# Altium PCB 模拟计量PCB.PcbDoc
Units mm, origin at the board's own origin, x right, y up, seen from the top; angles counter-clockwise.
Board outline 64.01 x 39.12 mm, 2 copper layers (Top Layer, Bottom Layer); 38 components, 29 nets, 133 pads, 115 vias.
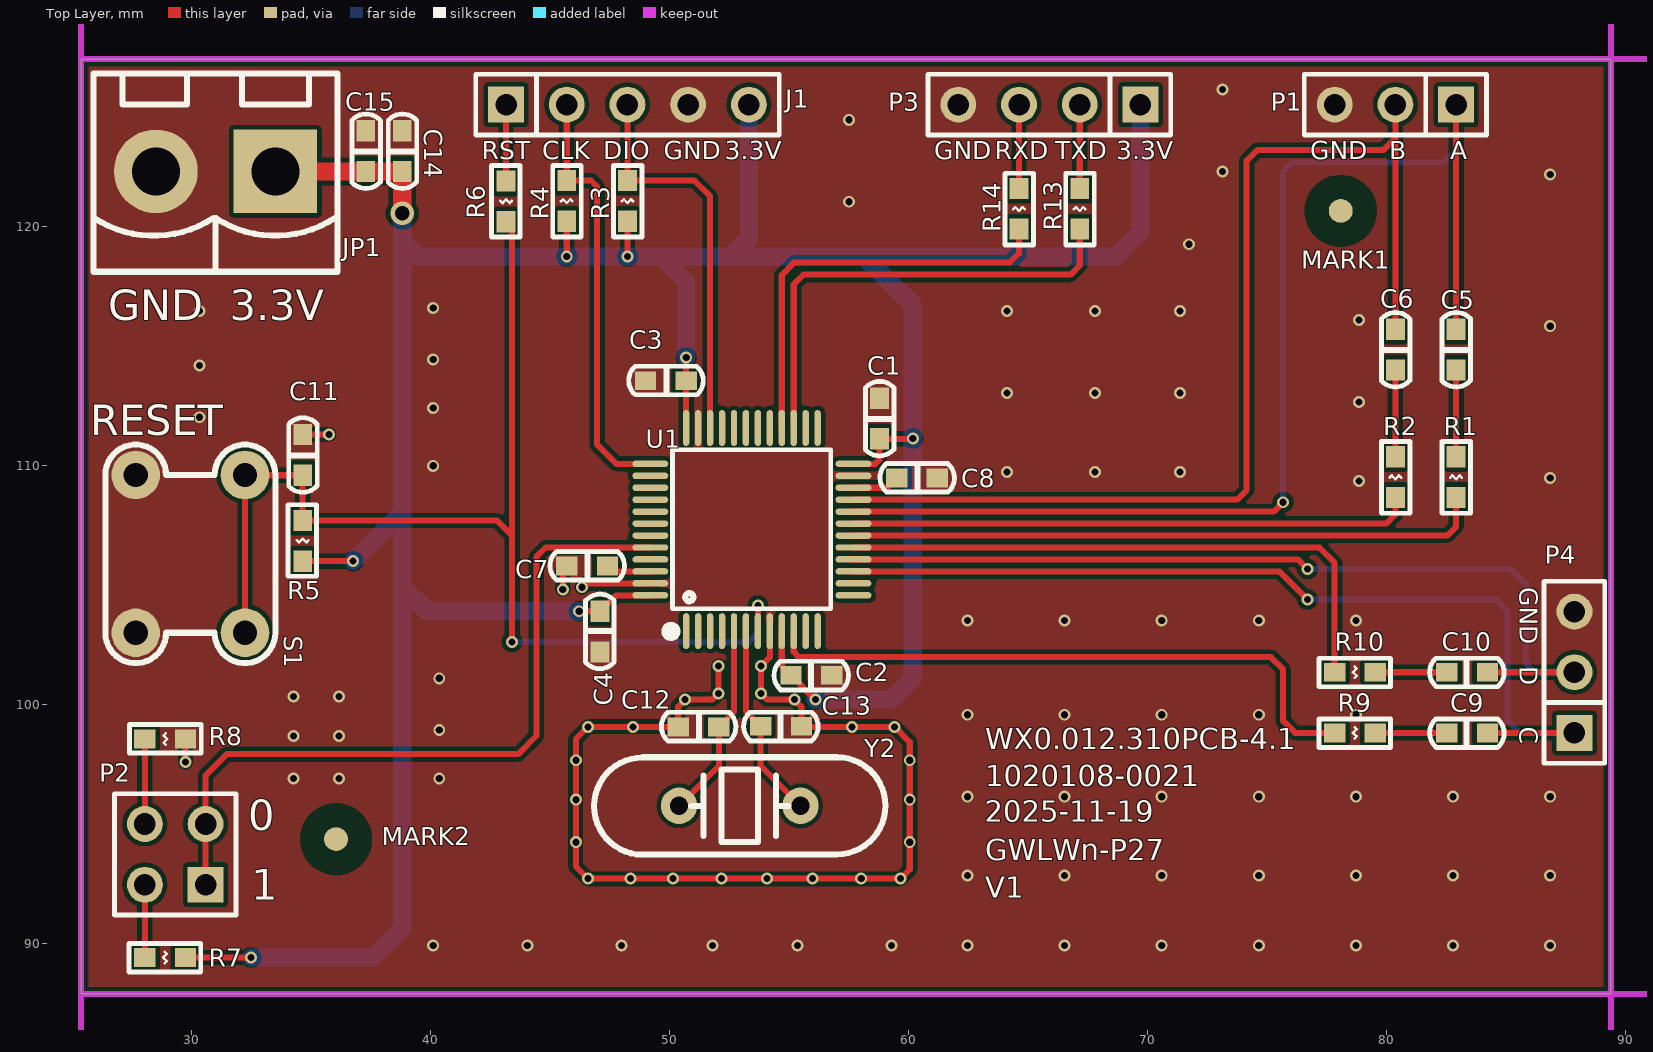
[diagram p0: Top Layer view]
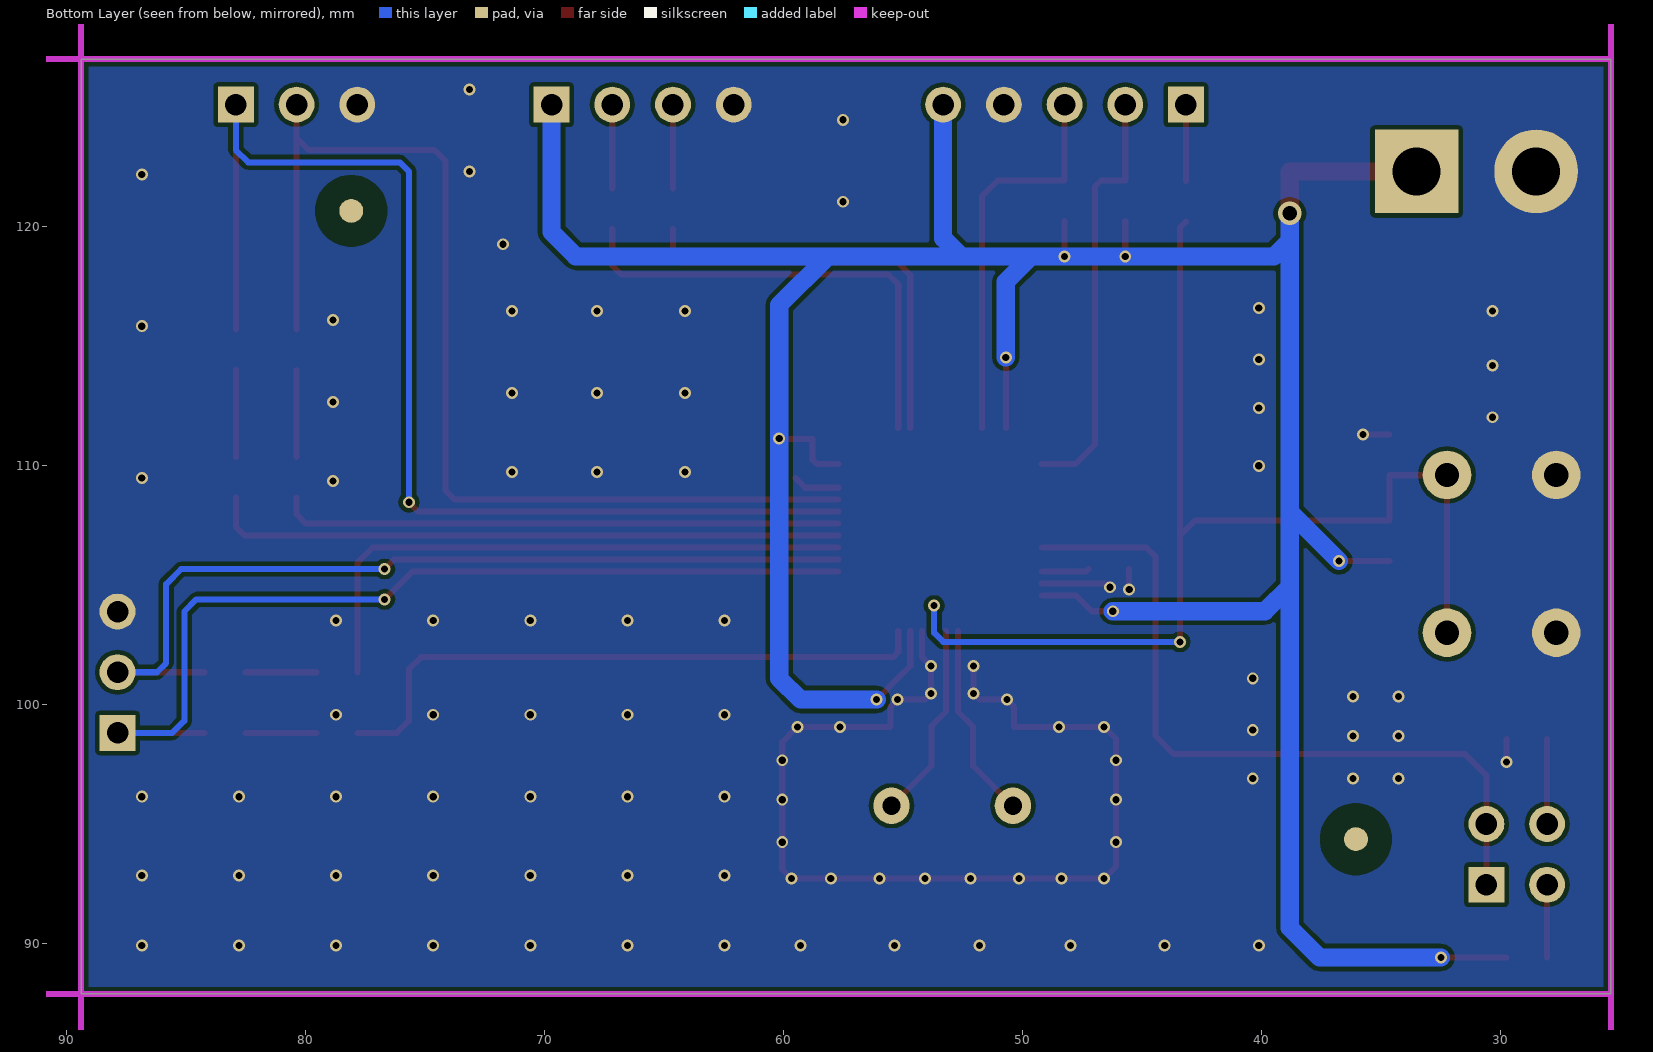
[diagram p1: Bottom Layer view, seen from below]

## Layer stack, top to bottom
Top Solder: solder mask 0.0102, Solder Resist, Dk 3.5
Top Layer: signal copper 0.0356
Dielectric 1: dielectric 0.32, FR-4, Dk 4.8
Bottom Layer: signal copper 0.0356
Bottom Solder: solder mask 0.0102, Solder Resist, Dk 3.5

## Board outline
25.4,87.884 25.4,127 89.408,127 89.408,87.884

## Design rules (kind name [scope] priority, off if disabled: settings)
Clearance [All] p1: gap=0.178 ignorepadtopadclearanceinfootprint=FALSE except(0: Arc-Hole Track-Hole SMDPad-Hole THPad-Hole Via-Hole Fill-Hole Poly-Hole Region-Hole Text-Hole; 0.127: SMDPad-SMDPad)
MinimumSolderMaskSliver [All] p1: minsoldermaskwidth=0.127
PolygonConnect [All] p1: connectstyle=Direct reliefconductorwidth=0.254 reliefentries=4 polygonreliefangle="90 Angle" airgapwidth=0.254
RoutingVias [All] p1: holewidth=0.711 width=1.27 viastyle="Through Hole" minholewidth=0.711 minwidth=1.27 maxholewidth=0.711 maxwidth=1.27
SilkToSilkClearance [All] p1: silktosilkclearance=0
SilkToSolderMaskClearance [IsPad] p1: minsilkscreentomaskgap=0 clearancetoexposedcopper=TRUE
SolderMaskExpansion [All] p1: expansion=0.102
Width [All] p1: maxlimit=0.762 minlimit=0.254 preferedwidth=0.254
27 further rules are at their usual default settings.

## Classes and differential pairs
component class STM32H503CBT61_STM32H503CBT6: C1 C2 C3 C4 C5 C6 C7 C8 C9 C10 C11 C12 C13 C14 C15 J1 JP1 P1 P2 P3 P4 R1 R2 R3 R4 R5 R6 R7 R8 R9 R10 R13 R14 S1 U1 Y2

## Components (designator, comment, footprint, x,y, rotation, side; value= is the part's Value field where it differs from the comment)
C1 "100nF/50V" CAP0603 58.801,111.125 r90 top
C2 "100nF/50V" CAP0603 55.118,101.219 r0 top
C3 "100nF/50V" CAP0603 50.704,113.538 r180 top
C4 "100nF/50V" CAP0603 47.117,103.886 r270 top
C5 "33pF/50V" CAP0603 82.931,114.008 r90 top
C6 "33pF/50V" CAP0603 80.391,114.008 r90 top
C7 "100nF/50V" CAP0603 47.409,105.791 r180 top
C8 "100nF/50V" CAP0603 61.214,109.474 r180 top
C9 "33pF/50V" CAP0603 82.55,98.806 r0 top
C10 "33pF/50V" CAP0603 82.55,101.346 r0 top
C11 "100nF/50V" CAP0603 34.671,109.601 r90 top
C12 "10pF/50V" CAP0603 52.07,99.06 r180 top
C13 "10pF/50V" CAP0603 53.848,99.085 r0 top
C14 "100nF/50V" CAP0603 38.837,122.313 r90 top
C15 "10uF/10V" CAP0603 37.313,122.313 r90 top
J1 "PIN254_1*5*WXHJ" PIN254_1*5*1100S 43.18,125.095 r0 top
JP1 "KF129_508_2" KF129_508_2 33.528,122.301 r180 top
MARK1 "Comment" MARK 78.105,120.65 r0 top
MARK2 "Comment" MARK 36.068,94.361 r0 top
P1 "PIN254_1*3*WXHJ" "PIN254_1*3*1100S - duplicate" 82.931,125.095 r180 top
P2 "Header 2X2" HDR2X2 30.607,92.456 r90 top
P3 "PIN254_1*4*WXHJ" PIN254_1*4*1100S 69.723,125.095 r180 top
P4 "PIN254_1*3*WXHJ" "PIN254_1*3*1100S - duplicate" 87.884,98.806 r90 top
R1 "3.3K 1%" RES0603 82.931,108.661 r90 top
R2 "3.3K 1%" RES0603 80.391,108.661 r90 top
R3 "10K 5%" RES0603 48.26,120.218 r90 top
R4 "10K 5%" RES0603 45.72,120.218 r90 top
R5 "10K 5%" RES0603 34.671,107.696 r270 top
R6 "100R 1%" RES0603 43.18,121.895 r270 top
R7 "1K 5%" RES0603 28.067,89.408 r0 top
R8 "1K 5%" RES0603 29.769,98.552 r180 top
R9 "3.3K 1%" RES0603 77.851,98.806 r0 top
R10 "3.3K 1%" RES0603 77.851,101.346 r0 top
R13 "1K 5%" RES0603 67.183,119.888 r90 top
R14 "1K 5%" RES0603 64.643,119.888 r90 top
S1 "SWT_4_600_600_430" SWT_4_600_600 29.972,106.299 r90 top
U1 "STM32H503CBT6" LQFP-48 53.467,107.315 r0 top
Y2 "8M" HC-49S 52.959,95.758 r0 top

## Footprints (in the part's own frame and the unit in brackets; to place one, negate y for a bottom-side part, rotate by r counter-clockwise, add the part's x,y. Pads: shape width x height; smd on the part's side, far side on the other; paste and mask are expansions set on the pad)
CAP0603 [mil]
  rect 35x31 smd: 1(-0.49,0) 2(66.51,0)
  silkscreen extent -29,-24 94,23, body extent 1,-15 72,15, height 20
HC-49S [mil]
  round 60 hole 30: 1(-100,0) 2(100,0)
  silkscreen extent -240,-80 240,80, body extent -223,-93 223,90, height 138
HDR2X2 [mm] "Connector; Header; 2x2 Position"
  rect 1.5x1.5 hole 0.9: 1(0,0)
  round 1.5 hole 0.9: 2(0,2.54) 3(2.54,0) 4(2.54,2.54)
  silkscreen extent -1.27,-1.27 3.81,3.81
KF129_508_2 [mm]
  rect 3.5x3.5 hole 2: 1(0,0)
  round 3.5 hole 2: 2(5,0)
  silkscreen extent -2.6,-4.1 7.6,4.2
LQFP-48 [mm]
  oval 0.27x1.5 smd paste+0 mask+0.05: 1(-2.75,-4.25) 2(-2.25,-4.25) 3(-1.75,-4.25) 4(-1.25,-4.25) 5(-0.75,-4.25) 6(-0.25,-4.25) 7(0.25,-4.25) 8(0.75,-4.25) 9(1.25,-4.25) 10(1.75,-4.25) 11(2.25,-4.25) 12(2.75,-4.25) 25(2.75,4.25) 26(2.25,4.25) 27(1.75,4.25) 28(1.25,4.25) 29(0.75,4.25) 30(0.25,4.25) 31(-0.25,4.25) 32(-0.75,4.25) 33(-1.25,4.25) 34(-1.75,4.25) 35(-2.25,4.25) 36(-2.75,4.25)
  oval 1.5x0.27 smd paste+0 mask+0.05: 13(4.25,-2.75) 14(4.25,-2.25) 15(4.25,-1.75) 16(4.25,-1.25) 17(4.25,-0.75) 18(4.25,-0.25) 19(4.25,0.25) 20(4.25,0.75) 21(4.25,1.25) 22(4.25,1.75) 23(4.25,2.25) 24(4.25,2.75) 37(-4.25,2.75) 38(-4.25,2.25) 39(-4.25,1.75) 40(-4.25,1.25) 41(-4.25,0.75) 42(-4.25,0.25) 43(-4.25,-0.25) 44(-4.25,-0.75) 45(-4.25,-1.25) 46(-4.25,-1.75) 47(-4.25,-2.25) 48(-4.25,-2.75)
  silkscreen extent -3.59,-4.46 3.3,3.34
MARK [mm]
  round 1 smd: 0(0,0)
  round 1 smd far side: 1(0,0)
  Top Layer pour cut-out: -1.5,0 -1.5,-0.148 -1.442,-0.438 -1.329,-0.711 -1.165,-0.956 -0.956,-1.165 -0.711,-1.329 -0.438,-1.442 -0.148,-1.5 0,-1.5 0.148,-1.5 0.438,-1.442 0.711,-1.329 0.956,-1.165 1.165,-0.956 1.329,-0.711 1.442,-0.438 1.5,-0.148 1.5,0 1.5,0.148 1.442,0.438 1.329,0.711 1.165,0.956 0.956,1.165 0.711,1.329 0.438,1.442 0.148,1.5 0,1.5 -0.148,1.5 -0.438,1.442 -0.711,1.329 -0.956,1.165 -1.165,0.956 -1.329,0.711 -1.442,0.438 -1.5,0.148 -1.5,0
  Bottom Layer pour cut-out: -1.5,0 -1.5,-0.148 -1.442,-0.438 -1.329,-0.711 -1.165,-0.956 -0.956,-1.165 -0.711,-1.329 -0.438,-1.442 -0.148,-1.5 0,-1.5 0.148,-1.5 0.438,-1.442 0.711,-1.329 0.956,-1.165 1.165,-0.956 1.329,-0.711 1.442,-0.438 1.5,-0.148 1.5,0 1.5,0.148 1.442,0.438 1.329,0.711 1.165,0.956 0.956,1.165 0.711,1.329 0.438,1.442 0.148,1.5 0,1.5 -0.148,1.5 -0.438,1.442 -0.711,1.329 -0.956,1.165 -1.165,0.956 -1.329,0.711 -1.442,0.438 -1.5,0.148 -1.5,0
"PIN254_1*3*1100S - duplicate" [mm] "Connector; Header; 4 Position"
  rect 1.5x1.5 hole 0.9: 1(0,0)
  round 1.5 hole 0.9: 2(2.54,0) 3(5.08,0)
  silkscreen extent -1.27,-1.27 6.35,1.27
PIN254_1*4*1100S [mm] "Connector; Header; 4 Position"
  rect 1.5x1.5 hole 0.9: 1(0,0)
  round 1.5 hole 0.9: 2(2.54,0) 3(5.08,0) 4(7.62,0)
  silkscreen extent -1.27,-1.27 8.89,1.27, body extent -1.3,-1.3 8.86,1.24, height 8.54
PIN254_1*5*1100S [mm]
  rect 1.5x1.5 hole 0.9: 1(0,0)
  round 1.5 hole 0.9: 2(2.54,0) 3(5.08,0) 4(7.62,0) 5(10.16,0)
  silkscreen extent -1.27,-1.27 11.43,1.27
RES0603 [mil]
  rect 35x31 smd: 1(0,0) 2(67,0)
  silkscreen extent -26,-24 92,23, body extent 0,-15 71,15, height 12
SWT_4_600_600 [mil]
  round 80 hole 40: 1(-130,-90) 1(130,-90) 2(-130,90) 2(130,90)
  silkscreen extent -180,-140 180,140, body extent -130,-90 130,90, height 157

## Part data
C1 C2 C3 C4 C7 C8 C11 C14: library part 101020103-0021, "104pF,50 V,±10%,0603,国巨,CC0603KRX7R9BB104", Part Name=0603贴片电容, ID=3, Part Number=101020103-0021, SMD/DIP=SMD
C5 C6 C9 C10: library part 101020103-0027, "33pF,50 V,±10%,0603,国巨,CC0603KRNPO9BN33", Part Name=0603贴片电容, ID=17, Part Number=101020103-0027, SMD/DIP=SMD
C12 C13: library part 101020103-0014, "10pF,50 V,±5%,0603,X7R,国巨,CC0603JRNPO9BN100", Part Name=0603贴片电容, ID=7, Part Number=101020103-0014, SMD/DIP=SMD
C15: library part 101020103-0026, "106pF,10 V,±10%,0603,村田,GRM188R61A106KE47D", Part Name=0603贴片电容, ID=8, Part Number=101020103-0026, SMD/DIP=SMD
J1: library part AD_WXHJ_PinHeader_02, "1*5 ，Φ1.0 ，2.54mm，直脚,无需焊接器件", Part Name=排针, ID=17, Part Number=AD_WXHJ_PinHeader_02, SMD/DIP=DIP
JP1: library part 1010904-0015, "KF129-2P,螺丝紧固,2,ABS,松涛", Part Name=接线端子, ID=7, Part Number=1010904-0015, SMD/DIP=DIP
P1 P4: library part AD_WXHJ_PinHeader_01, "1*3 ，Φ1.0 ，2.54mm，直脚,无需焊接器件", Part Name=排针, ID=16, Part Number=AD_WXHJ_PinHeader_01, SMD/DIP=DIP
P2: "Header, 4-Pin, Dual row"
P3: library part AD_WXHJ_PinHeader_01, "1*4 ，Φ1.0 ，2.54mm，直脚,无需焊接器件", Part Name=排针, ID=16, Part Number=AD_WXHJ_PinHeader_01, SMD/DIP=DIP
R1 R2 R9 R10: library part 101010103-0059, "3.3K±1%,1/10W,0603", Part Name=0603贴片电阻, ID=40, Part Number=101010103-0059, SMD/DIP=SMD
R3 R4 R5: library part 101010103-0003, "国巨,±5%,0603,,155 ℃,-55 ℃,RC0603JR-0710KL,无铅,200 ppm/℃,1/10W,,10K", Part Name=0603贴片电阻, ID=7, Part Number=101010103-0003, SMD/DIP=SMD
R6: library part 101010103-0041, "100Ω,±1%,1/10W,0603,国巨股份有限公司,RC0603FR-07100RL", Part Name=0603贴片电阻, ID=4, Part Number=101010103-0041, SMD/DIP=SMD
R7 R8 R13 R14: library part 101010103-0008, "1K,±5%,1/10W,0603,国巨,RC0603JR-071KL", Part Name=0603贴片电阻, ID=10, Part Number=101010103-0008, SMD/DIP=SMD
S1: library part 1011001-0027, "TS-1102,机械轻触,6*6*4.3直插,6*6*4.3直插,乐清市羽欧电子", Part Name=按键, ID=32, Part Number=1011001-0027, SMD/DIP=DIP
U1: JLCPCB Part Class="Extended Part", Manufacturer=ST(意法半导体), Add into BOM=yes, Comment_1=STM32H503CBT6, Convert to PCB=yes, Datasheet=https://atta.szlcsc.com/upload/public/pdf/source/20240910/D4990ECC418F560B9DBCE13634236E70.pdf, Device=STM32H503CBT6, LCSC Part Name=STM32H503CBT6, Manufacturer Part=STM32H503CBT6, Supplier=LCSC, Supplier Footprint=LQFP-48(7x7), Supplier Part=C17700273, Symbol=STM32H503CBT6
Y2: library part 1010601-0007, "8M,HC-49,8M,100 ppm/℃,无源,红星,8M无源晶振", Part Name=晶振, ID=21, Part Number=1010601-0007, SMD/DIP=DIP

## Via types
v1: diameter 0.5, hole 0.3, Top Layer to Bottom Layer, tented both sides, 114 vias
v2: diameter 1, hole 0.6, Top Layer to Bottom Layer, tented both sides, 1 vias

## Nets (pads, with @x,y where several pads share a name; then routed paths per layer and width w, separated by ;. In a path a pad name is that pad's centre, name@x,y a point inside that pad or via, vN(x,y) a via of type N, cw(c..) or ccw(c..) an arc to the next point about the centre after c; other vN are vias at no path point)
3.3V: C1.1 C2.1 C3.1 C4.1 C14.1 C15.1 J1.5 JP1.1 P3.1 R3.1 R4.1 R5.2 R7.2 U1.9 U1.24 U1.36 U1.48 | length 146.6
  Top Layer w0.254: R7.2 v1(32.512,89.408) ; R5.2 v1(36.779,105.994) ; v1(45.72,118.745) R4.1 ; v1(46.24,103.898) C4.1 47.783,104.565 U1.48 ; v1(48.26,118.745) R3.1 ; U1.36 C3.1 v1(50.717,114.51) ; U1.9 54.717,101.608 C2.1 v1(56.122,100.203) ; U1.24 58.63,110.065 58.801,110.236 C1.1 60.186,111.113 v1(60.198,111.125)
  Top Layer w0.762: JP1.1 C15.1 C14.1 v2(38.837,120.548)
  Bottom Layer w0.762: v1(32.512,89.408) 37.592,89.408 38.837,90.653 38.837,104.94 ; v1(36.779,105.994) 38.837,108.052 ; v2(38.837,120.548) 38.837,119.405 ; v1(46.24,103.898) 39.878,103.898 38.837,104.94 ; v1(50.717,114.51) 50.717,117.685 49.657,118.745 ; J1.5 53.34,119.507 52.578,118.745 ; v1(56.122,100.203) 59.309,100.203 60.198,101.092 v1(60.198,111.125) 60.198,116.713 58.166,118.745 ; P3.1 69.723,119.761 68.707,118.745 58.166,118.745 ; 38.837,104.94 38.837,108.052 ; 38.837,108.052 38.837,119.405 ; 38.837,119.405 39.497,118.745 v1(45.72,118.745) v1(48.26,118.745) 49.657,118.745 ; 49.657,118.745 52.578,118.745 ; 52.578,118.745 58.166,118.745
BOOT0: P2.1 P2.3 U1.44 | length 31.5
  Top Layer w0.254: P2.1 P2.3 30.607,97.028 31.496,97.917 43.688,97.917 44.45,98.679 44.45,106.172 44.843,106.565 U1.44
GND: C1.2 C2.2 C3.2 C4.2 C7.2 C8.1 C11.2 C12.2 C13.2 C14.2 C15.2 J1.4 JP1.2 P1.3 P3.4 P4.3 R8.1 S1.2 U1.8 U1.23 U1.35 U1.47 | length 49.6
  Top Layer w0.254: v1(29.769,97.587) R8.1 ; C11.2 v1(35.776,111.29) ; v1(45.555,104.813) C7.2@45.555,105.664 ; v1(46.355,104.902) 46.518,105.065 U1.47 ; v1(52.07,101.6) v1(52.07,100.457) 51.816,100.203 v1(50.673,100.203) 50.381,99.911 C12.2 v1(46.609,99.06) 46.101,98.552 46.101,93.218 v1(46.609,92.71) v1(59.69,92.71) 60.071,93.091 60.071,98.425 v1(59.436,99.06) 55.563,99.06 C13.2 55.537,99.911 v1(55.245,100.203) 54.102,100.203 v1(53.848,100.457) v1(53.848,101.6) 54.217,101.969 U1.8
  other v1: 40.132,89.916 44.069,89.916 48.006,89.916 51.816,89.916 55.372,89.916 59.309,89.916 62.484,89.916 66.548,89.916 70.612,89.916 74.676,89.916 78.74,89.916 82.804,89.916 86.868,89.916 48.387,92.71 50.165,92.71 52.197,92.71 54.102,92.71 56.007,92.71 58.039,92.71 62.484,92.837 66.548,92.837 70.612,92.837 74.676,92.837 78.74,92.837 82.804,92.837 86.868,92.837 46.101,94.234 60.071,94.234 46.101,96.012 60.071,96.012 62.484,96.139 66.548,96.139 70.612,96.139 74.676,96.139 78.74,96.139 82.804,96.139 86.868,96.139 34.29,96.901 36.195,96.901 40.386,96.901 46.101,97.663 60.071,97.663 34.29,98.679 36.195,98.679 40.386,98.933 48.495,99.06 57.658,99.06 62.484,99.568 66.548,99.568 70.612,99.568 74.676,99.568 78.74,99.568 34.29,100.33 36.195,100.33 40.386,101.092 62.484,103.505 66.548,103.505 70.612,103.505 74.676,103.505 78.74,103.505 78.867,109.347 86.868,109.474 64.135,109.728 67.818,109.728 71.374,109.728 40.132,109.982 30.353,112.014 40.132,112.395 78.867,112.649 64.135,113.03 67.818,113.03 71.374,113.03 30.353,114.173 40.132,114.427 86.868,115.824 78.867,116.078 30.353,116.459 64.135,116.459 67.818,116.459 71.374,116.459 40.132,116.586 71.755,119.253 57.531,121.031 86.868,122.174 73.152,122.301 57.531,124.46 73.152,125.73
INPUT_A: C5.2 P1.1 U1.20 | length 50.9
  Top Layer w0.254: U1.20 75.299,108.065 v1(75.692,108.458) ; C5.2 P1.1
  Bottom Layer w0.254: v1(75.692,108.458) 75.692,122.301 76.073,122.682 82.423,122.682 82.931,123.19 P1.1
INPUT_B: C6.2 P1.2 U1.21 | length 46.4
  Top Layer w0.254: U1.21 73.767,108.565 74.168,108.966 74.168,122.745 74.612,123.19 79.883,123.19 80.391,123.698 ; C6.2 80.391,123.698 ; P1.2 80.391,123.698
INPUT_C: C9.2 P4.1 U1.15 | length 39.3
  Top Layer w0.254: U1.15 75.537,105.565 v1(76.708,104.394) ; C9.2 P4.1
  Bottom Layer w0.254: v1(76.708,104.394) 84.582,104.394 85.09,103.886 85.09,99.314 85.598,98.806 P4.1
INPUT_D: C10.2 P4.2 U1.16 | length 37.7
  Top Layer w0.254: U1.16 76.307,106.065 v1(76.708,105.664) ; C10.2 P4.2
  Bottom Layer w0.254: v1(76.708,105.664) 85.217,105.664 85.852,105.029 85.852,101.727 86.233,101.346 P4.2
MCU_RXD: R14.1 U1.28 | length 17.7
  Top Layer w0.254: U1.28 54.717,117.963 55.245,118.491 64.262,118.491 64.643,118.872 R14.1
MCU_TXD: R13.1 U1.27 | length 19.8
  Top Layer w0.254: U1.27 55.217,117.574 55.626,117.983 66.802,117.983 67.183,118.364 R13.1
NetC5_1: C5.1 R1.2 | length 3.6
  Top Layer w0.254: R1.2 C5.1
NetC6_1: C6.1 R2.2 | length 3.6
  Top Layer w0.254: R2.2 C6.1
NetC9_1: C9.1 R9.2 | length 3
  Top Layer w0.254: R9.2 C9.1
NetC10_1: C10.1 R10.2 | length 3
  Top Layer w0.254: R10.2 C10.1
NetJ1_1: J1.1 R6.1 | length 3.2
  Top Layer w0.254: R6.1 J1.1
NetP2_2: P2.2 R7.1 | length 3
  Top Layer w0.254: R7.1 P2.2
NetP2_4: P2.4 R8.2 | length 3.6
  Top Layer w0.254: P2.4 R8.2
NetP3_2: P3.2 R13.2 | length 3.5
  Top Layer w0.254: R13.2 P3.2
NetP3_3: P3.3 R14.2 | length 3.5
  Top Layer w0.254: R14.2 P3.3
OSC8M_IN: C12.1 U1.5 Y2.1 | length 8.3
  Top Layer w0.254: Y2.1 52.082,97.421 C12.1 52.717,99.694 U1.5
OSC8M_OUT: C13.1 U1.6 Y2.2 | length 8.3
  Top Layer w0.254: U1.6 53.217,99.704 C13.1 53.836,97.421 Y2.2
PWM_A: R1.1 U1.18 | length 26.6
  Top Layer w0.254: U1.18 82.554,107.065 82.931,107.442 R1.1
PWM_B: R2.1 U1.19 | length 23.5
  Top Layer w0.254: U1.19 80.006,107.565 80.391,107.95 R2.1
PWM_C: R9.1 U1.10 | length 26.2
  Top Layer w0.254: U1.10 55.217,102.199 55.435,101.981 75.184,101.981 75.692,101.473 75.692,99.314 76.2,98.806 R9.1
PWM_D: R10.1 U1.17 | length 25
  Top Layer w0.254: U1.17 77.204,106.565 77.851,105.918 R10.1
RESET: C11.1 R5.1 R6.2 S1.1 U1.7 | length 50.3
  Top Layer w0.254: S1.1@32.258,102.997 32.258,109.601 32.27,109.589 C11.1 R5.1 42.799,107.696 43.434,107.061 ; R6.2 43.434,119.939 43.434,107.061 ; v1(43.434,102.616) 43.434,107.061 ; U1.7 v1(53.717,104.136)
  Bottom Layer w0.254: v1(43.434,102.616) 53.34,102.616 53.717,102.993 v1(53.717,104.136)
SWCLK: J1.2 R4.2 U1.37 | length 17.9
  Top Layer w0.254: J1.2 R4.2 46.736,121.92 46.99,121.666 46.99,110.871 47.796,110.065 U1.37
SWDIO: J1.3 R3.2 U1.34 | length 16.6
  Top Layer w0.254: J1.3 R3.2 51.054,121.92 51.717,121.257 U1.34
VCAP1: C7.1 U1.46 | length 2
  Top Layer w0.254: C7.1@47.256,105.664 47.356,105.565 U1.46
VCAP2: C8.2 U1.22 | length 2
  Top Layer w0.254: U1.22 59.116,109.065 C8.2
pads on no net: MARK1.0 MARK1.1 MARK2.0 MARK2.1 U1.1 U1.2 U1.3 U1.4 U1.11 U1.12 U1.13 U1.14 U1.25 U1.26 U1.29 U1.30 U1.31 U1.32 U1.33 U1.38 U1.39 U1.40 U1.41 U1.42 U1.43 U1.45

## Polygon pours and split planes (outlines as drawn)
GND on Top Layer "GND" (solid, remove dead copper, pour order 22): 25.4,127 89.408,127 89.408,87.884 25.4,87.884
GND on Bottom Layer "GND" (solid, remove dead copper, pour order 24): 25.4,127 89.408,127 89.408,87.884 25.4,87.884

## Keep-outs
Keep-Out Layer:
  lines w0.254: 25.4,84.884 25.4,87.884 ; 25.4,84.888 153.416,84.884 153.416,87.884 ; 89.408,84.886 89.408,87.884 ; 89.408,208.232 89.408,205.232 ; 25.4,87.884 89.408,87.884 ; 25.4,87.884 25.4,127 ; 25.4,127 25.4,166.116 ; 25.4,127 89.408,127 ; 25.4,127 89.408,127 ; 25.4,166.116 89.408,166.116 ; 25.4,166.116 25.4,205.232 ; 25.4,205.232 89.408,205.232 ; 25.4,205.232 25.4,208.232 153.416,208.232 153.416,205.232 ; 89.408,87.884 89.408,127 ; 89.408,87.884 153.416,87.884 ; 89.408,87.884 89.408,127 ; 89.408,127 89.408,166.116 ; 89.408,127 153.416,127 ; 89.408,127 89.408,166.116 ; 89.408,127 153.416,127 ; 89.408,166.116 153.416,166.116 ; 89.408,166.116 89.408,205.232 ; 89.408,166.116 89.408,205.232 ; 89.408,205.232 153.416,205.232 ; 153.416,87.884 153.416,127 ; 153.416,127 153.416,166.116 ; 153.416,166.116 153.416,205.232

## Silkscreen, mask and mechanical layers (free items; w line width, h text height)
Top Overlay:
  text "RST" at 42.164,122.809 h0.76
  text "CLK" at 44.704,122.809 h0.76
  text "DIO" at 47.244,122.809 h0.76
  text "GND" at 49.784,122.809 h0.76
  text "3.3V" at 52.324,122.809 h0.76
  text "GND" at 61.087,122.809 h0.76
  text "RXD" at 63.627,122.809 h0.76
  text "TXD" at 66.167,122.809 h0.76
  text "3.3V" at 68.707,122.809 h0.76
  text "GND" at 76.835,122.809 h0.76
  text "B" at 80.137,122.809 h0.76
  text "A" at 82.677,122.809 h0.76
  text "GND" at 26.543,116.078 h1.27
  text "3.3V" at 31.623,116.078 h1.27
  text "RESET" at 25.781,111.252 h1.27
  text "GND" at 85.598,104.902 h0.76 r270
  text "D" at 85.598,101.6 h0.76 r270
  text "C" at 85.598,99.06 h0.76 r270
  text "WX0.012.310PCB-4.1" at 63.221,97.841 h1.52
  text "1020108-0021" at 63.221,96.291 h1.52
  text "2025-11-19" at 63.219,94.793 h1.52
  text "0" at 32.385,94.742 h1.27
  text "GWLWn-P27" at 63.221,93.193 h1.52
  text "1" at 32.512,91.821 h1.27
  text "V1" at 63.222,91.618 h1.52